# EAGLE board ACRoBaT - led board (EAGLE 7.4.0)
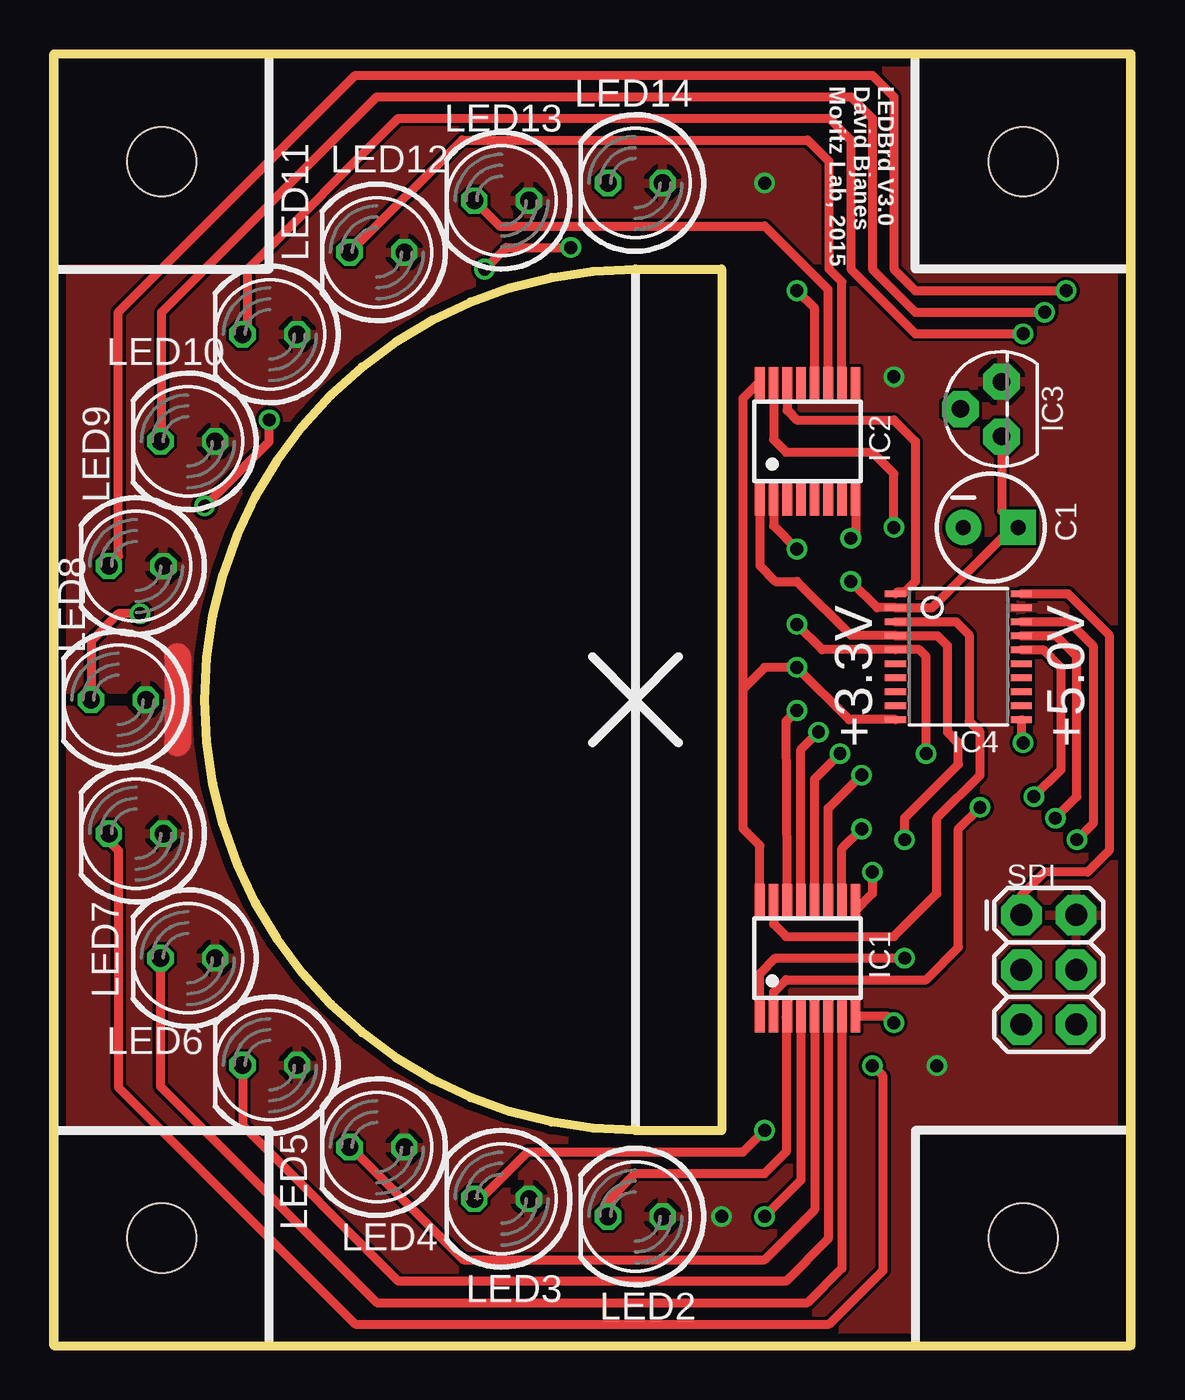
[diagram p0: board, top side]
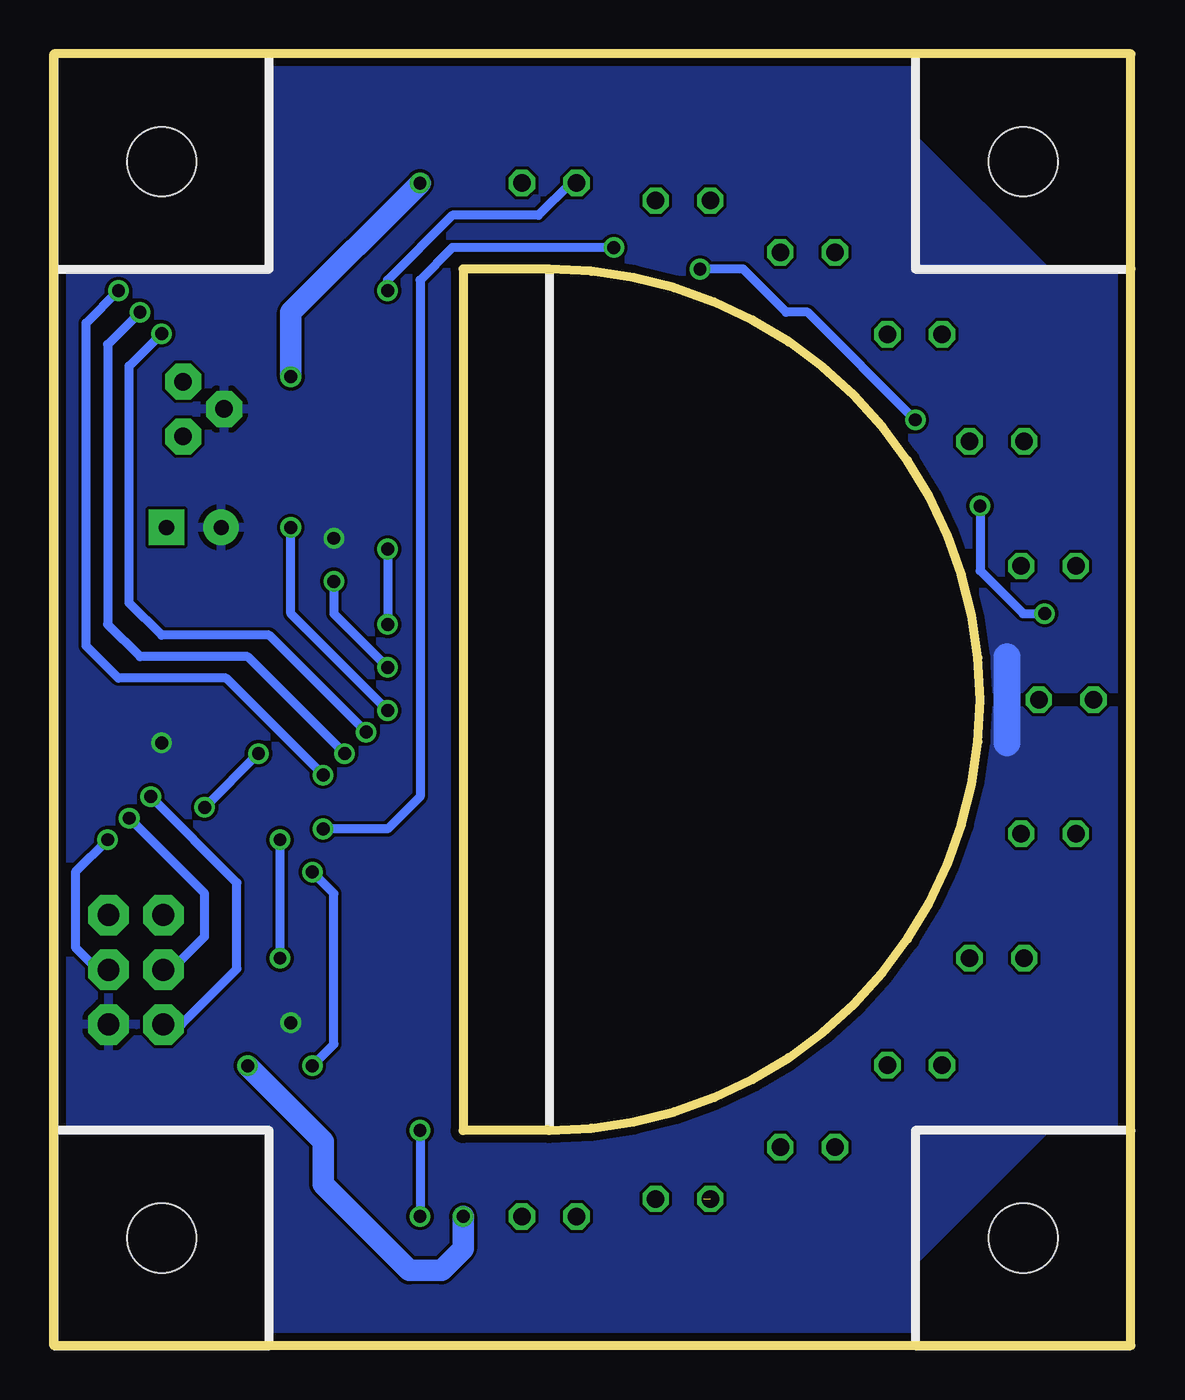
[diagram p1: board, bottom side, seen from below]

Size 50 x 60 mm. Coordinates in mm from the lower left corner, seen from the top.
Outline: 0,0 50,0 50,60 0,60 0,0
Outline: 27,10 arc-180 27,50 31,50 31,10 27,10
Copper layers (1*16): Top 0.0356mm / dielectric 1.5011mm / Bottom 0.0356mm
Design rules "LaenPCBOrder": minimum track width 6mil, minimum drill 13mil, track to track 6mil, track to pad 6mil, pad to pad 6mil, via to via 6mil, smd to smd 6mil, copper to edge 15mil, drill to drill 6mil, minimum pad ring 7mil, minimum via ring 7mil, stop-mask expansion 3mil, vias tented up to drill 0mil, thermal gap 10mil
Holes 3.2 mm at 5,5 5,55 45,55 45,5

## Footprints (pad centres in the part's own frame; a part is rotated, then mirrored left to right if it is on the bottom)
CPOL-RADIAL-10UF-25V = drill 0.7 pad 1.651 square: 1 1.27,0 | drill 0.7 pad 1.651: 2 -1.27,0
QSOP16 = smd 0.45 x 1.5: 1 -2.223,-2.69; 2 -1.587,-2.69; 3 -0.953,-2.69; 4 -0.318,-2.69; 5 0.318,-2.69; 6 0.953,-2.69; 7 1.587,-2.69; 8 2.223,-2.69; 9 2.223,2.69; 10 1.587,2.69; 11 0.953,2.69; 12 0.318,2.69; 13 -0.318,2.69; 14 -0.953,2.69; 15 -1.587,2.69; 16 -2.223,2.69
TO92 = drill 0.813 pad 1.676 octagon: 1 -1.27,0; 2 0,1.905; 3 1.27,0
TSSOP20 = smd 0.305 x 0.991: 1 -2.925,-2.918; 2 -2.275,-2.918; 3 -1.625,-2.918; 4 -0.975,-2.918; 5 -0.325,-2.918; 6 0.325,-2.918; 7 0.975,-2.918; 8 1.625,-2.918; 9 2.275,-2.918; 10 2.925,-2.918; 11 2.925,2.918; 12 2.275,2.918; 13 1.625,2.918; 14 0.975,2.918; 15 0.325,2.918; 16 -0.325,2.918; 17 -0.975,2.918; 18 -1.625,2.918; 19 -2.275,2.918; 20 -2.925,2.918
LED5MM = drill 0.813 octagon: A -1.27,0; K 1.27,0
2X3 = drill 1.016 pad 1.88 octagon: 1 0,0; 2 0,2.54; 3 2.54,0; 4 2.54,2.54; 5 5.08,0; 6 5.08,2.54

## Placement (x,y rotation side)
C1  10uF  [CPOL-RADIAL-10UF-25V]  43.5,38 0 top
IC1  [QSOP16]  35,18 0 top
IC2  [QSOP16]  35,42 0 top
IC3  L4931-3.3  [TO92]  44,43.5 90 top
IC4  [TSSOP20]  42,32 270 top
LED2  [LED5MM]  27,6 180 top
LED3  [LED5MM]  20.79,6.82 180 top
LED4  [LED5MM]  15,9.22 180 top
LED5  [LED5MM]  10.03,13.03 180 top
LED6  [LED5MM]  6.22,18 180 top
LED7  [LED5MM]  3.82,23.78 180 top
LED8  [LED5MM]  3,30 180 top
LED9  [LED5MM]  3.82,36.21 180 top
LED10  [LED5MM]  6.22,42 180 top
LED11  [LED5MM]  10.03,46.97 180 top
LED12  [LED5MM]  15,50.78 180 top
LED13  [LED5MM]  20.79,53.18 180 top
LED14  [LED5MM]  27,54 180 top
SPI  FEMALE 2x3  [2X3]  44.92,20 270 top

## Library data of the parts
C1 = SparkFun-Capacitors
IC1 IC2 = max696x
IC3 IC4 = adafruit
LED2-LED14 = led
SPI = SparkFun-Connectors; PROD_ID: CONN-11566

## Nets
3.3V: C1.1 IC1.16 IC2.16 IC3.1 IC4.2 IC4.10
DOUT_3.3V: IC1.14 IC2.15
GND: C1.2 IC1.8 IC2.8 IC3.2 IC4.11 SPI.6
MISO_3.3V: IC2.14 IC4.1
MISO_5V: IC4.20 SPI.1
MOSI_3.3V: IC1.15 IC4.3
MOSI_5V: IC4.18 SPI.4
N$4: IC1.3 LED2.K
N$17: IC1.4 LED3.K
N$18: IC1.5 LED4.K
N$19: IC1.6 LED5.K
N$20: IC1.7 LED6.K
N$22: IC1.9 LED7.K
N$23: IC1.10 LED8.K
N$24: IC1.11 LED9.K
N$25: IC1.12 LED10.K
N$26: IC1.13 LED11.K
N$27: IC2.10 LED12.K
N$28: IC2.11 LED13.K
N$29: IC2.12 LED14.K
SCK_3.3V: IC1.1 IC2.1 IC4.4
SCK_5V: IC4.17 SPI.3
SS_3.3V: IC1.2 IC2.2 IC4.5
SS_5V: IC4.16 SPI.5
VCC: IC3.3 IC4.19 LED2.A LED3.A LED4.A LED5.A LED6.A LED7.A LED8.A LED9.A LED10.A LED11.A LED12.A LED13.A LED14.A SPI.2

## Tracks (layer width: path | path; a pad name or v marks a point on that pad's centre or on a via)
3.3V  (via drill 0.6)
  Top 0.406: 32,30.5 32,24 32.78,23.22 IC1.16 | 32,30.5 32,44 32.69,44.69 IC2.16 | IC4.10 36.92,29.07 v34.5,31.5 33,31.5 32,30.5 | IC3.1 44,38.77 C1.1 44.27,37.77 40.77,34.27 IC4.2 38.23,34.27 v37,35.5
  Bottom 0.406: v37,35.5 37,34 v34.5,31.5
DOUT_3.3V  (via drill 0.6)
  Top 0.406: IC2.15 33.41,42.09 34,41.5 38,41.5 39,40.5 v39,38 | IC1.14 34.05,21.95 34,29 v34.5,29.5
  Bottom 0.406: v34.5,29.5 39,34 v39,38
GND  (via drill 0.6)
  Top 0.406: IC1.8 38.69,15.31 v39,15 | IC2.8 37.22,37.72 v37,37.5 | IC4.11 44.92,28.08 v45,28
  Bottom 1.25: 5.75,32 5.75,28
  pour Bottom: 10,0 40,0 40,10 50,10 50,50 40,50 40,60 10,60 10,56 4,50 0,50 0,30.5 7,30.5 arc-90 26.5,50 31,50 31,10 26.5,10 arc-90 7,29.5 0,29.5 0,10 4,10 10,4
MISO_3.3V
  Top 0.406: IC2.14 34.05,43.45 34.5,43 39,43 40,42 40,35.5 39.5,35 39.16,35 IC4.1
MISO_5V
  Top 0.406: IC4.20 47.08,34.92 49,33 49,23 48,22 46,22 44.92,20.92 SPI.1
MOSI_3.3V
  Top 0.406: IC1.15 33.41,19.59 34,19 39,19 41,21 41,24.5 43,26.5 43,28.5 42.5,29 42.5,33 41.88,33.62 IC4.3
MOSI_5V  (via drill 0.6)
  Top 0.406: IC4.18 47.12,33.62 48.25,32.5 48.25,24.25 v47.5,23.5
  Bottom 0.406: v47.5,23.5 49,22 49,18.5 47.96,17.46 SPI.4
N$4
  Top 0.406: LED2.K 25.73,6.73 27,8 33,8 34,9 34,15.26 IC1.3
N$17  (via drill 0.6)  (1 unrouted)
  Top 0.406: IC1.4 34.68,7.68 v33,6 | 19.82,6.82 22,9 32,9 v33,10
  Bottom 0.406: v33,10 v33,6
N$18
  Top 0.406: LED4.K 13.78,9.22 19,4 33,4 35.32,6.32 IC1.5
N$19
  Top 0.406: LED5.K 8.76,10.24 16,3 34,3 35.95,4.95 IC1.6
N$20
  Top 0.406: LED6.K 4.95,12.05 15,2 35,2 36.59,3.59 IC1.7
N$22  (via drill 0.6)
  Top 0.406: LED7.K 2.55,23.45 3,23 3,12 14,1 36,1 38.5,3.5 38.5,12.5 v38,13 | v38,22 38,21 37.22,20.22 IC1.9
  Bottom 0.406: v38,13 37,14 37,21 v38,22
N$23  (via drill 0.6)
  Top 0.406: v7,39 10,42 v10,43 | v20,50 21,51 v24,51 | IC1.10 36.59,23.09 v37.5,24 | v4,34 3,34 1.73,32.73 LED8.K
  Bottom 0.406: v10,43 15,48 16,48 18,50 v20,50 | v24,51 31.5,51 33,49.5 33,25.5 34.5,24 v37.5,24 | v7,39 7,36 5,34 v4,34
N$24  (via drill 0.6)
  Top 0.406: LED9.K 3,36.66 3,48 14,59 38,59 39,58 39,50 40,49 v47,49 | IC1.11 35.95,24.95 v37.5,26.5
  Bottom 0.406: v37.5,26.5 42,31 47,31 48.5,32.5 48.5,47.5 v47,49
N$25  (via drill 0.6)
  Top 0.406: LED10.K 5,42.05 5,48 15,58 37,58 38,57 38,50 40,48 v46,48 | IC1.12 35.32,26.32 v36.5,27.5
  Bottom 0.406: v36.5,27.5 41,32 46,32 47.5,33.5 47.5,46.5 v46,48
N$26  (via drill 0.6)
  Top 0.406: LED11.K 9,47.21 9,50 16,57 36,57 37,56 37,50 40,47 v45,47 | IC1.13 34.68,27.68 v35.5,28.5
  Bottom 0.406: v45,47 46.5,45.5 46.5,34.5 45,33 40,33 v35.5,28.5
N$27
  Top 0.406: LED12.K 18.95,56 35,56 36,55 36,50 36.59,49.41 IC2.10
N$28
  Top 0.406: LED13.K 20.7,52 33,52 35.95,49.05 IC2.11
N$29  (via drill 0.6)
  Top 0.406: v34.5,49 35.32,48.18 IC2.12
  Bottom 0.406: LED14.K 26,54 27.5,52.5 31.5,52.5 34.5,49.5 v34.5,49
SCK_3.3V  (via drill 0.6)
  Top 0.406: IC2.1 32.78,36.22 33.5,35.5 34.5,35.5 37,33 39.06,33 IC4.4 41.02,32.98 41.5,32.5 41.5,28.5 42,28 42,27 39.5,24.5 v39.5,23.5 | IC1.1 32.78,17.28 33.5,18 v39.5,18
  Bottom 0.406: v39.5,18 v39.5,23.5
SCK_5V  (via drill 0.6)
  Top 0.406: IC4.17 46.52,32.98 47.5,32 47.5,25.5 v46.5,24.5
  Bottom 0.406: SPI.3 44.54,17.46 43,19 43,21 v46.5,24.5
SS_3.3V  (via drill 0.6)
  Top 0.406: IC2.2 33.41,38.09 v34.5,37 | IC1.2 33.41,16.41 34,17 40.5,17 42,18.5 42,24 v43,25 | v34.5,33.5 35.67,32.33 IC4.5 40.17,32.33 40.5,32 v40.5,27.5
  Bottom 0.406: v34.5,37 v34.5,33.5 | v43,25 v40.5,27.5
SS_5V  (via drill 0.6)
  Top 0.406: IC4.16 45.92,32.33 46.75,31.5 46.75,26.75 v45.5,25.5
  Bottom 0.406: SPI.5 44.08,14.92 41.5,17.5 41.5,21.5 v45.5,25.5
VCC  (via drill 0.6)
  Top 1.25: 5.75,32 5.75,28
  Bottom 1: v39,45 39,48 v33,54 | v31,6 31,4.5 32,3.5 33.5,3.5 37.5,7.5 37.5,9.5 v41,13
  pour Top: 0,10 10,10 10,0 40,0 40,10 50,10 50,50 40,50 40,60 10,60 10,50 0,50 0,30.5 7,30.5 arc-90 27,50 31,50 31,10 27,10 arc-90 7,29.5 0,29.5

## Text on the board
tPlace: LEDBrd V3.0 / David Bjanes / Moritz Lab, 2015
tNames: +3.3V | +5.0V